# Altium PCB TC-ADAPT.PcbDoc
Units mil, origin at the board's own origin, x right, y up, seen from the top; angles counter-clockwise.
Board outline 838.58 x 1715.55 mil, 2 copper layers (Top Layer, Bottom Layer), stack 64.8 mil thick; 5 components, 5 nets, 27 pads, 3 vias.
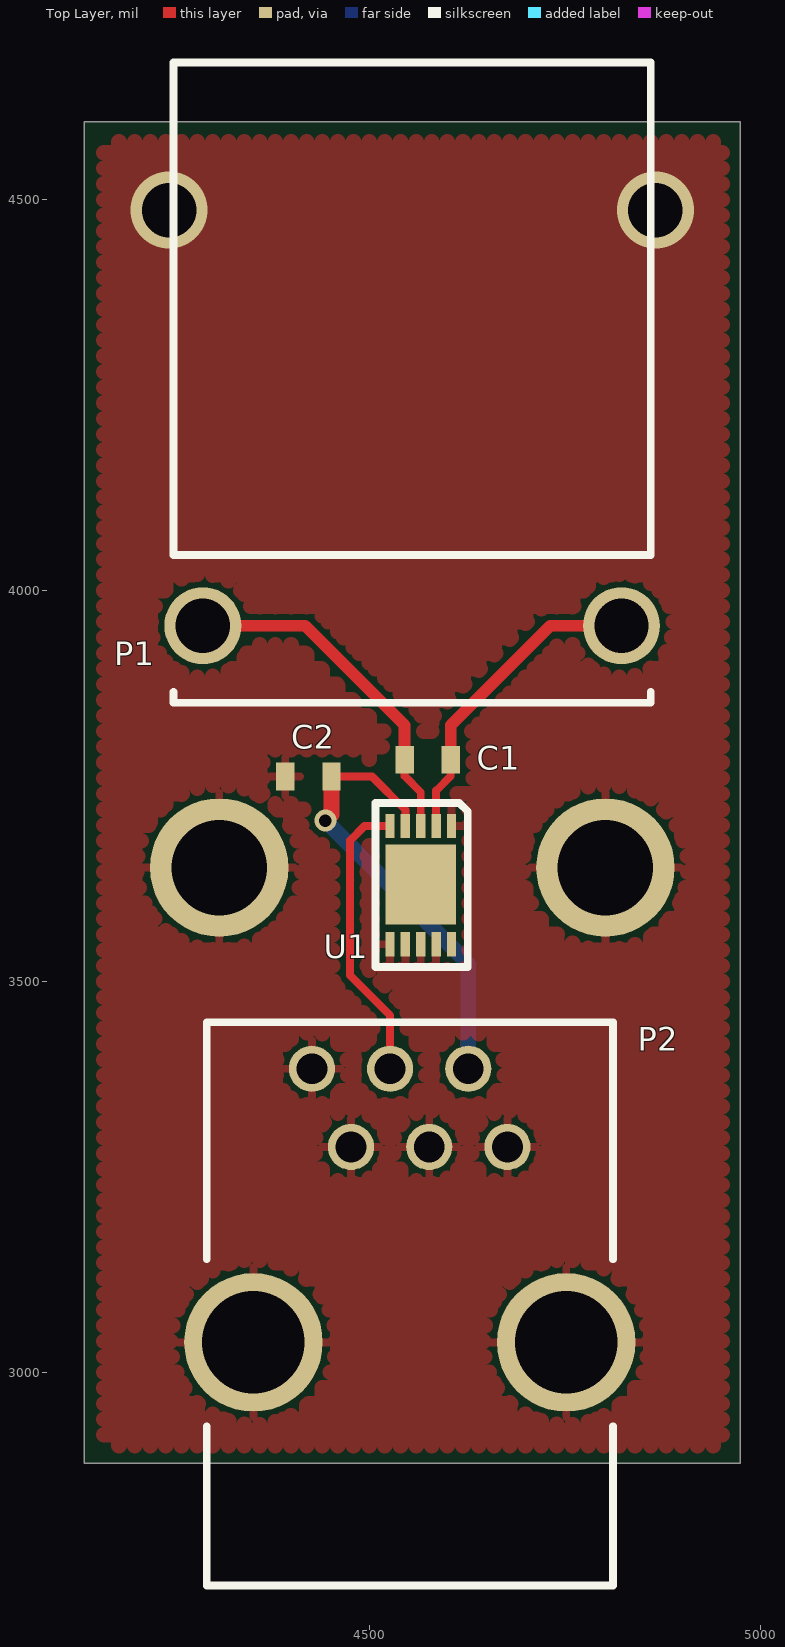
[diagram p0: Top Layer view]
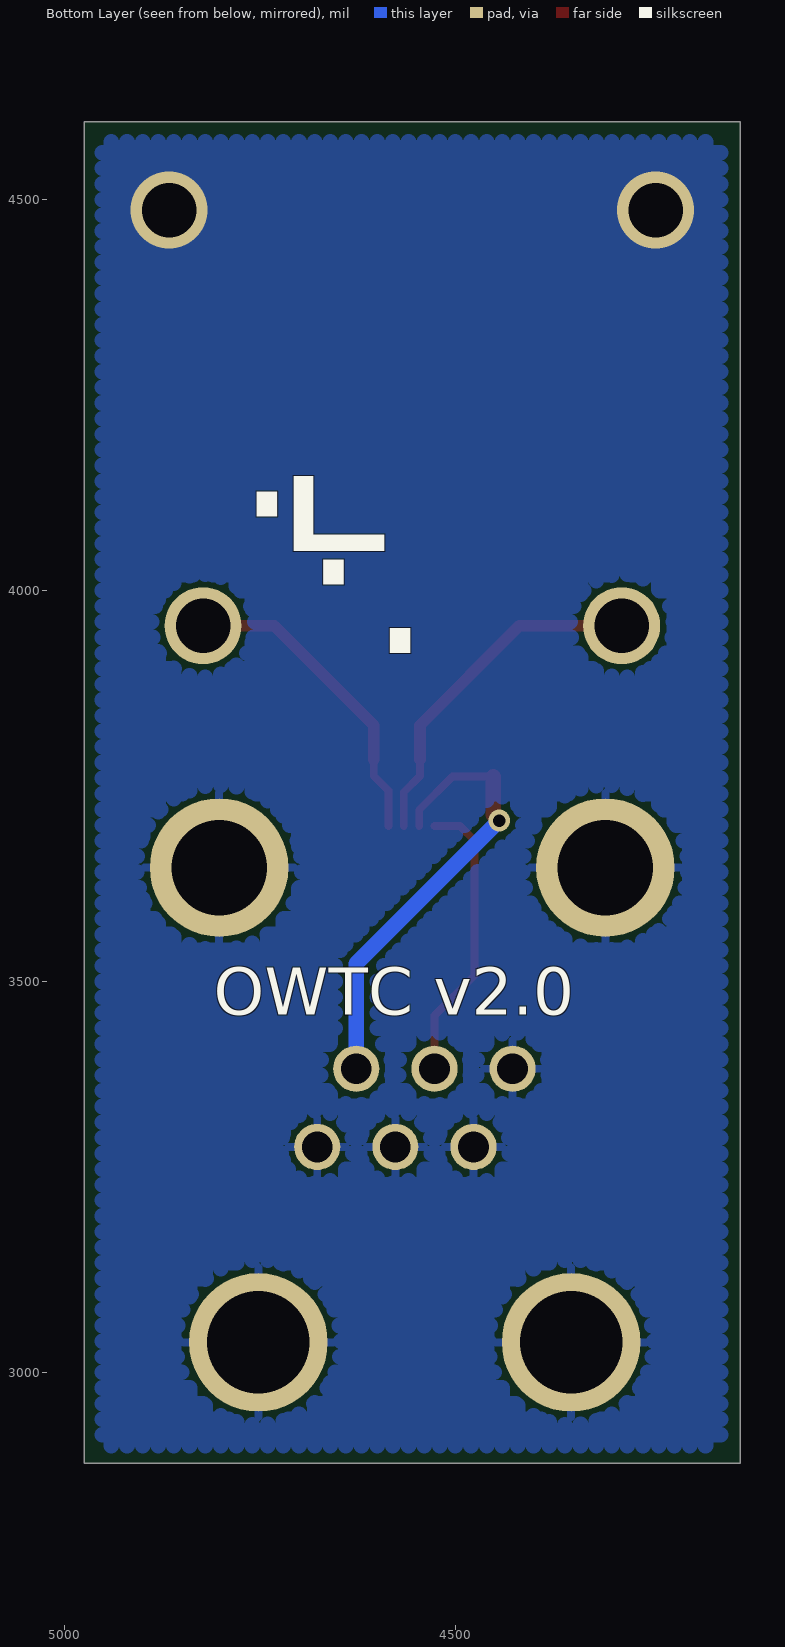
[diagram p1: Bottom Layer view, seen from below]

## Layer stack, top to bottom
Top Layer: signal copper 1.4
Dielectric: core 62, FR-4, Dk 4.8
Bottom Layer: signal copper 1.4

## Board outline
4135.83,2883.86 4135.83,4599.41 4974.41,4599.41 4974.41,2883.86

## Design rules (kind name [scope] priority, off if disabled: settings)
Clearance [All] p1: gap=7
HoleSize [All] p1: absolutevalues=TRUE maxlimit=250 minlimit=1 maxpercent=80.000 minpercent=20.000
MinimumSolderMaskSliver [All] p1: minsoldermaskwidth=1
PolygonConnect ViaConnect [IsVia] p1: connectstyle=Direct reliefconductorwidth=10 reliefentries=4 polygonreliefangle="90 Angle"
PolygonConnect [All] p2: connectstyle=Relief reliefconductorwidth=10 reliefentries=4 polygonreliefangle="90 Angle"
RoutingVias [All] p1: holewidth=28 width=50 viastyle="Through Hole" minholewidth=28 minwidth=50 maxholewidth=28 maxwidth=50
SilkToSilkClearance [All] p1: silktosilkclearance=0
SilkscreenOverComponentPads [All] p1: minsilkscreentomaskgap=4
SolderMaskExpansion [All] p1: expansion=4
Width [All] p1: maxlimit=50 minlimit=10 preferedwidth=10
24 further rules are at their usual default settings.

## Components (designator, comment, footprint, x,y, rotation, side; value= is the part's Value field where it differs from the comment)
C1 "Cap" 0603 4574.8,3783.46 r180 top
C2 "Cap" 0603 4422.24,3762.08 r180 top
P1 "Thermocouple" PCC-SMP 4555,3955 r90 top
P2 "ONEWIRE" "CONN MOD JACK R/A 6P6C" 4751.97,3038.39 r270 top
U1 "MAX31850KATB+" "TDFN-EP - MAX31850" 4605.31,3698.82 r270 top

## Footprints (in the part's own frame and the unit in brackets; to place one, negate y for a bottom-side part, rotate by r counter-clockwise, add the part's x,y. Pads: shape width x height; smd on the part's side, far side on the other; paste and mask are expansions set on the pad)
0603 [mm]
  rect 0.6x0.9 smd: 1(-0.75,0) 2(0.75,0)
"CONN MOD JACK R/A 6P6C" [mm] "RJ11 Jack"
  round 1.5 hole 1: 1(-8.89,-8.26) 2(-6.35,-6.99) 3(-8.89,-5.72) 4(-6.35,-4.45) 5(-8.89,-3.18) 6(-6.35,-1.91)
  round 4.5 hole 3.33: ""(0,0) ""(0,-10.16)
  silkscreen extent -10.4,-11.68 7.9,1.53
PCC-SMP [mm] "Thermocouple Connector"
  round 2.5 hole 1.77: 1(0,-6.8) 2(0,6.8)
  silkscreen extent -2.5,-7.75 18.3,7.75
"TDFN-EP - MAX31850" [mm]
  rect 0.79x0.3 smd mask+0.05: 1(0,0) 2(0,-0.5) 3(0,-1) 4(0,-1.5) 5(0,-2) 6(3.84,-2) 7(3.84,-1.5) 9(3.84,-0.5) 10(3.84,0)
  rect 0.79x0.3 smd paste+0 mask+0.05: 8(3.84,-1)
  rect 2.6x2.3 smd mask+0.05: ""(1.9,-1)
  silkscreen extent -0.75,-2.47 4.57,0.53

## Part data
C1 C2: "Capacitor"
P1: library part "Header 2", "Header, 2-Pin"
P2: library part "Header 6", "Header, 6-Pin"

## Free pads (board coordinates)
  round 177.16 hole 122.05: 0(4308.16,3645.67)
  round 177.17 hole 122.05: 0(4802.17,3645.67)

## Via types
v1: diameter 98.43, hole 69.69, Top Layer to Bottom Layer, 2 vias
v2: diameter 28, hole 16, Top Layer to Bottom Layer, tented both sides, 1 vias

## Nets (pads, with @x,y where several pads share a name; then routed paths per layer and width w, separated by ;. In a path a pad name is that pad's centre, name@x,y a point inside that pad or via, vN(x,y) a via of type N, cw(c..) or ccw(c..) an arc to the next point about the centre after c; other vN are vias at no path point)
GND: C2.2 P2. P2.1 P2.2 P2.4 P2.6 pad.0 U1.1 U1.6 U1.7 U1.8 U1.9
  other v1: 4243.98,4486.5 4866.02,4486.5
OW: P2.3 U1.5 | length 371.9
  Top Layer w10: U1.5 4494.09,3698.82 4475.39,3680.12 4475.39,3507.87 4526.77,3456.5 P2.3
T+: C1.2 P1.2 U1.3 | length 448.2
  Top Layer w10: C1.2 4545.28,3762.8 4565.94,3742.13 U1.3
  Top Layer w15: P1.2 4418.03,3955 4545.28,3827.76 C1.2
T-: C1.1 P1.1 U1.2 | length 469.9
  Top Layer w10: U1.2 4585.63,3744.09 4604.33,3762.8 C1.1
  Top Layer w12: P1.1@4798.65,3932 4832.24,3932 4845.72,3945.47 P1.1@4845.72,3955
  Top Layer w15: C1.1 4604.33,3827.76 4731.57,3955 P1.1
VDD: C2.1 P2.5 U1.4 | length 585.5
  Top Layer w10: C2.1 4503.67,3762.08 4546.26,3719.49 U1.4
  Top Layer w20: v2(4443.9,3705.71) 4451.77,3713.58 C2.1
  Bottom Layer w20: v2(4443.9,3705.71) 4626.77,3522.83 P2.5
pads on no net: U1. U1.10

## Polygon pours and split planes (outlines as drawn)
GND on Top Layer "Bottom Layer-No Net 1" (hatched 90Degree grid 20 track 20, remove dead copper, pour order 4): 4160.43,2906.5 4160.43,4573.82 4951.77,4573.82 4951.77,2906.5
GND on Bottom Layer "Bottom Layer-No Net 1" (hatched 90Degree grid 20 track 20, pour order 3): 4160.43,4573.82 4951.77,4573.82 4951.77,4531.02 4951.77,2906.5 4171,2906.5 4160.43,2906.5 4160.43,4573.82

## Silkscreen, mask and mechanical layers (free items; w line width, h text height)
Bottom Overlay:
  text "L" at 4731.54,3908.46 h750
  text "⋱" at 4783.46,3848.43 h500
  text "OWTC v2.0" at 4809.06,3457.68 h60
Mechanical 1:
  the board outline again, w10